# Altium PCB soldeerstation.PcbDoc (part 1 of 2)
Units mm, origin at the board's own origin, x right, y up, seen from the top; angles counter-clockwise.
Board outline 176.66 x 114.17 mm, 2 copper layers (Top Layer, Bottom Layer); 77 components, 72 nets, 293 pads, 46 vias.
Unrouted connection lines stored in the file: 9.
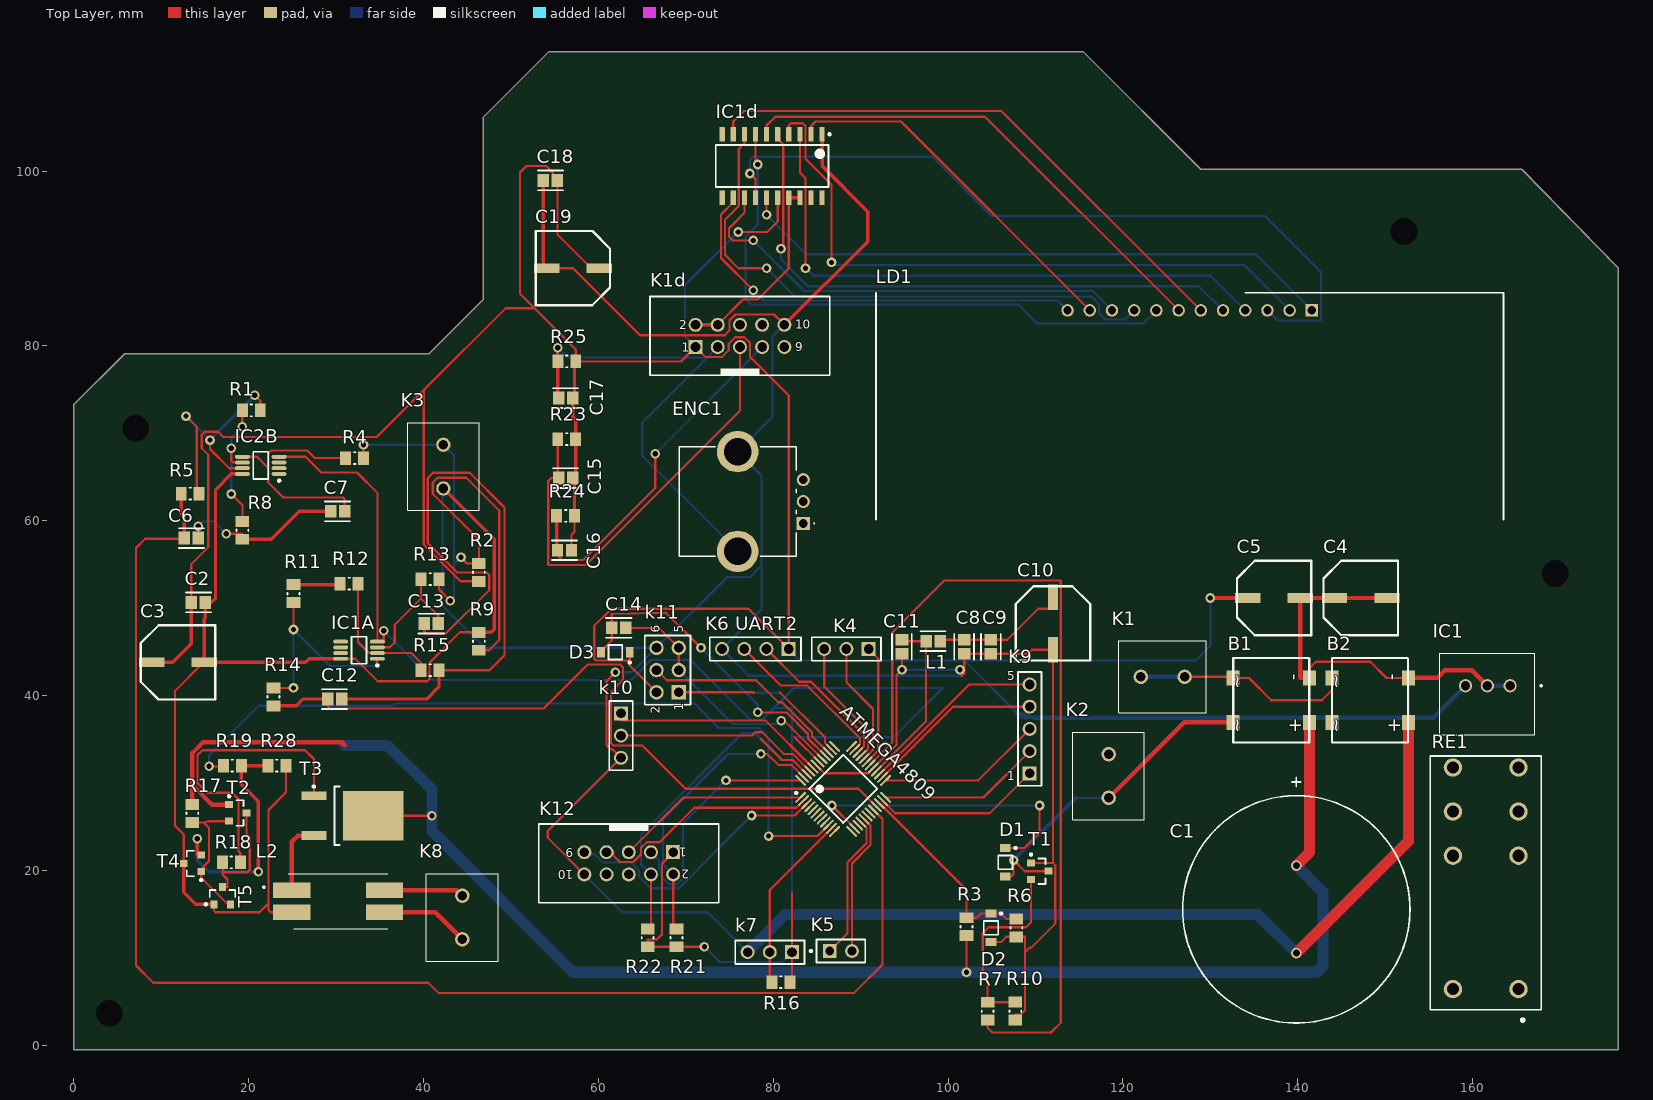
[diagram p0: Top Layer view]
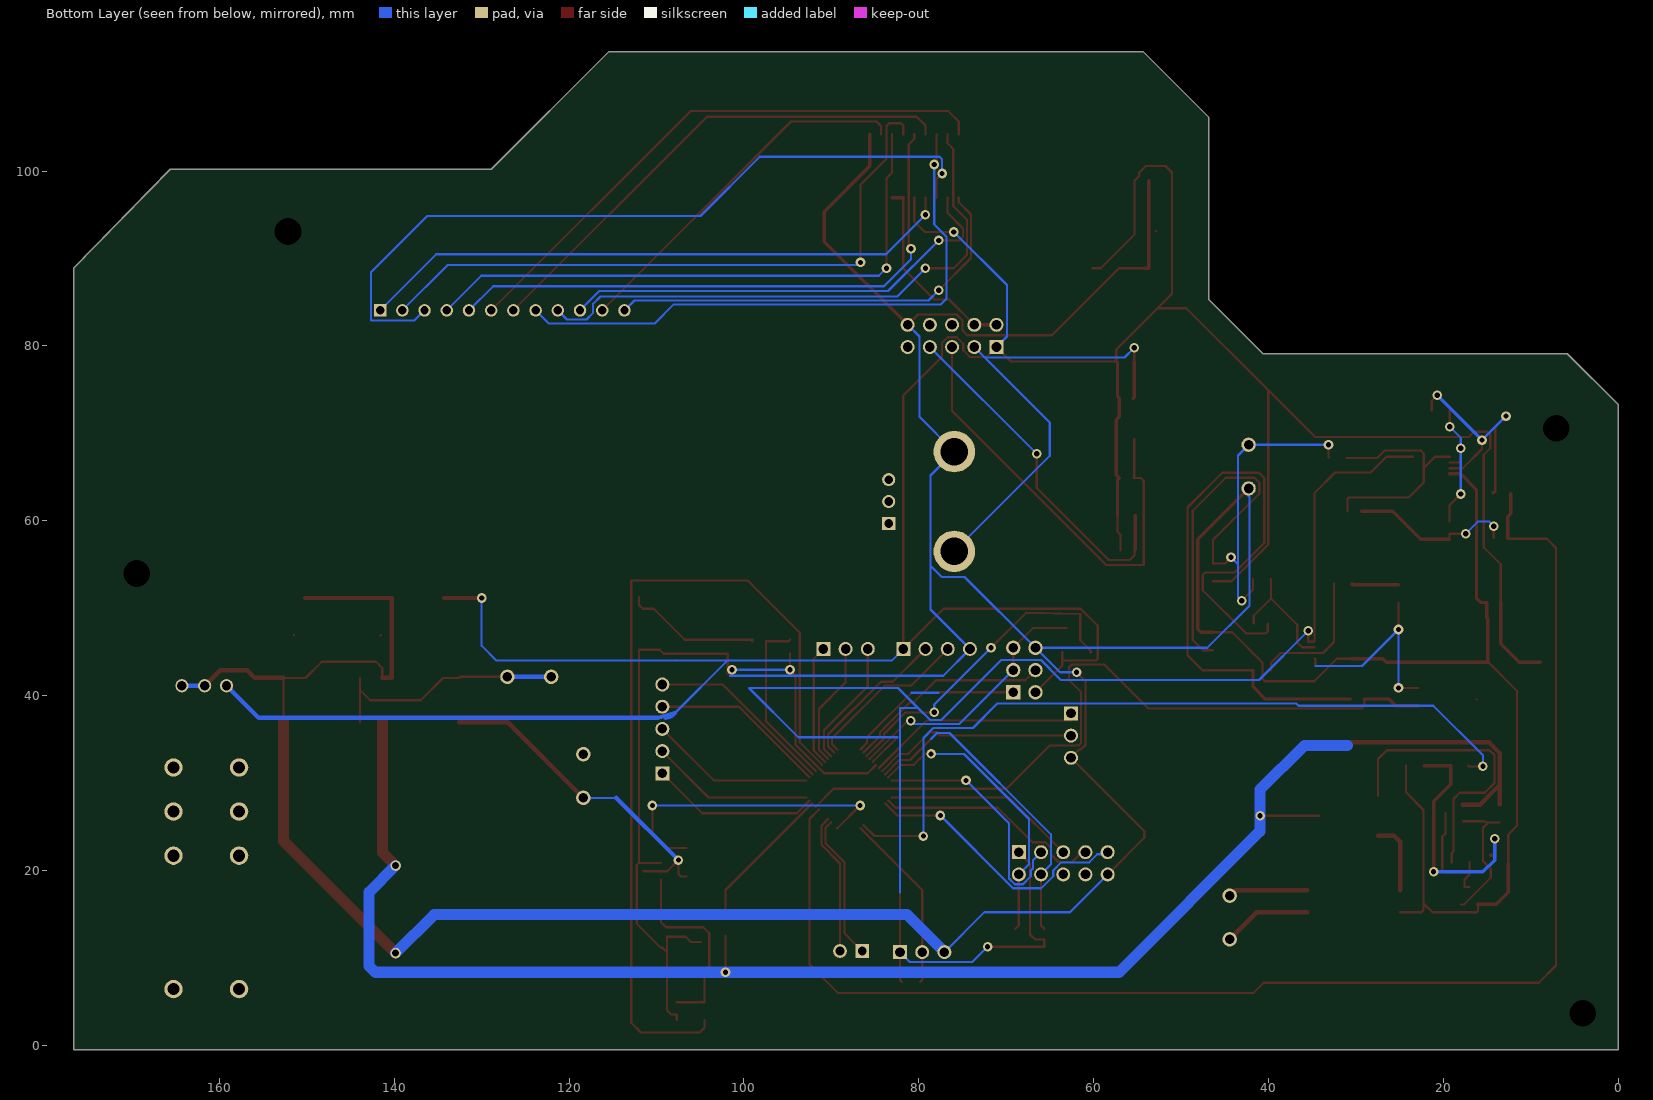
[diagram p1: Bottom Layer view, seen from below]

## Layer stack, top to bottom
Top Solder: solder mask 0.0102, Solder Resist, Dk 3.5
Top Layer: signal copper 0.0356
Dielectric 1: dielectric 0.32, FR-4, Dk 4.8
Bottom Layer: signal copper 0.0356
Bottom Solder: solder mask 0.0102, Solder Resist, Dk 3.5

## Board outline
115.443,113.665 128.905,100.203 165.608,100.203 176.657,88.9 176.657,-0.508 0,-0.508 0,73.279 5.842,79.121 40.64,79.121 46.863,85.344 46.863,106.172 54.356,113.665

## Design rules (kind name [scope] priority, off if disabled: settings)
Clearance [All] p1: gap=0.2 ignorepadtopadclearanceinfootprint=FALSE except(0: Arc-Hole Track-Hole SMDPad-Hole THPad-Hole Via-Hole Fill-Hole Poly-Hole Region-Hole Text-Hole)
Height [All] p1: minheight=0 maxheight=254 prefheight=12.7
PolygonConnect [All] p1: connectstyle=Relief reliefconductorwidth=0.254 reliefentries=4 polygonreliefangle="90 Angle" airgapwidth=0.254
RoomDefinition PWM_soldeerbout [False] p1: confinementstyle=ConfineIn formatcopy=TRUE lockcomponents=FALSE outline 7.239,36.703 50.546,36.703 50.546,5.588 7.239,5.588
RoutingVias [All] p1: holewidth=0.6 width=1.1 viastyle="Through Hole" minholewidth=0.6 minwidth=1.1 maxholewidth=0.6 maxwidth=1.1
SolderMaskExpansion [All] p1: expansion=0.102 istentingtop=FALSE
Width [All] p1: maxlimit=1.27 minlimit=0.248 preferedwidth=0.254 minimp=50.000000 maximp=50.000000 favimp=50.000000
29 further rules are at their usual default settings.

## Classes and differential pairs
component class Voeding: B1 B2 C1 C4 C5 D1 D2 IC1 K1 K2 R3 R6 R7 R10 RE1 T1
component class Thermokoppel: C2 C3 C6 C7 C12 C13 IC1A IC2B K3 R1 R2 R4 R5 R8 R9 R11 R12 R13 R14 R15
component class "PWM Soldeerbout": K8 L2 R17 R18 R19 R28 T2 T3 T4 T5
component class "Microcontroller CPU": C8 C9 C11 C14 D3 K4 K5 "K6 UART2" k7 K9 k10 k11 L1 R16 R21 R22
component class Display: C15 C16 C17 C18 C19 ENC1 IC1d K1d LD1 R23 R24 R25

## Components (designator, comment, footprint, x,y, rotation, side; value= is the part's Value field where it differs from the comment)
ATMEGA4809 "ATMEGA4809" FP-C04-300-PT-IPC_B 87.997,29.351 r45 top
B1 "Bridge_Rectifier" ttf 136.906,39.497 r270 top
B2 "Bridge_Rectifier" ttf 148.209,39.497 r270 top
C1 "4700µ 50v" CE_D25_L25_plugin 139.827,10.574 r90 top
C2 "10µ 50v" CC_0805_L 14.263,50.673 r0 top value="0.22 μF"
C3 "100n" CE_D8_L10 11.938,43.815 r180 top
C4 "100µ 25V" CE_D8_L10 147.193,51.181 r180 top
C5 "10µ 50V" CE_D8_L10 137.287,51.181 r180 top
C6 "10n" CC_0805_L 13.462,58.039 r0 top value="0.22 μF"
C7 "10n" CC_0805_L 30.187,61.087 r180 top value="0.22 μF"
C8 "100nf" CC_0805_L 101.84,45.607 r270 top value="0.22 μF"
C9 "100nf" CC_0805_L 104.888,45.607 r270 top value="0.22 μF"
C10 "10µf" CE_D8_L10 112,48.274 r90 top
C11 "100nf" CC_0805_L 94.728,45.607 r270 top value="0.22 μF"
C12 "10n" CC_0805_L 29.845,39.624 r0 top value="0.22 μF"
C13 "10n" CC_0805_L 40.894,48.26 r180 top value="0.22 μF"
C14 "100n" CC_0805_L 62.343,47.766 r0 top value="0.22 μF"
C15 "10n" CC_0805_L 56.261,64.897 r180 top value="0.22 μF"
C16 "10n" CC_0805_L 56.134,56.642 r180 top value="0.22 μF"
C17 "10n" CC_0805_L 56.261,74.041 r180 top value="0.22 μF"
C18 "100n" CC_0805_L 54.522,98.933 r180 top value="0.22 μF"
C19 "100µ" CE_D8_L10 57.102,88.9 r0 top
D1 "Diode" SOD-123FL 106.553,20.955 r270 top value=15pF
D2 "5v1" SOD-123FL 104.902,13.462 r270 top
D3 "Diode" SOD-123FL 61.962,44.972 r180 top value=15pF
ENC1 "ROTARY_ENCODER" PEC11R4225FN0024 83.446,59.715 r90 top
IC1 "OKI-78SR-5/1.5-W36-C" OKI78SR515W36C 164.271,41.148 r180 top
IC1A "Dual_Opamp" MSOP_8_M 32.639,45.212 r180 top
IC1d "TM1637" SOP_20_M 79.883,100.584 r270 top
IC2B "Dual_Opamp" MSOP_8_M 21.395,66.35 r180 top
K1 "282836-2" "Schroefconnector 2 Pin" 122.047,42.164 r180 top
K1d "61201021621" "box header 10-pin" 76.2,81.153 r0 top
K2 "282836-2" "Schroefconnector 2 Pin" 118.364,33.321 r90 top
K3 "282836-2" "Schroefconnector 2 Pin" 42.291,68.707 r90 top
K4 "61300311121" "pin header 1x3" 88.378,45.353 r180 top
K5 "M20-9990246" "pin header 1x2" 87.743,10.809 r0 top
"K6 UART2" "61300411121" "pin header 1x4" 77.964,45.353 r180 top
k7 "61300311121" "pin header 1x3" 79.615,10.682 r180 top
K8 "282836-2" "Schroefconnector 2 Pin" 44.45,12.145 r270 top
K9 "61300511121" "pin header 1x5" 109.333,36.209 r90 top
k10 "61300311121" "pin header 1x3" 62.597,35.447 r270 top
k11 "61300621121" "pin header 2x6" 67.931,42.94 r90 top
K12 "" "box header 10-pin" 63.486,20.842 r180 top
L1 "Choke" CC_0805_L 98.284,46.242 r0 top
L2 "Common_Mode_Choke" 2545 30.255,16.51 r270 top
LD1 "7 Segment" 7-Sigment 133.985,84.074 r270 top
R1 "18k" RESC2013X50X30ML20T20 20.32,72.644 r180 top
R2 "1M" RESC2013X50X30ML20T20 46.355,54.111 r270 top
R3 "68k" RESC2013X50X30ML20T20 102.108,13.589 r270 top
R4 "5K6" RESC2013X50X30ML20T20 32.131,67.183 r0 top
R5 "5K6" RESC2013X50X30ML20T20 13.335,63.119 r0 top
R6 "10k" RESC2013X50X30ML20T20 107.823,13.462 r90 top
R7 "10k" RESC2013X50X30ML20T20 104.521,3.928 r90 top
R8 "1k" RESC2013X50X30ML20T20 19.304,58.928 r90 top
R9 "10M" RESC2013X50X30ML20T20 46.355,46.228 r270 top
R10 "4k7" RESC2013X50X30ML20T20 107.696,3.937 r90 top
R11 "18k" RESC2013X50X30ML20T20 25.146,51.68 r90 top
R12 "18k" RESC2013X50X30ML20T20 31.496,52.832 r0 top
R13 "5K6" RESC2013X50X30ML20T20 40.767,53.34 r0 top
R14 "5K6" RESC2013X50X30ML20T20 22.86,39.878 r90 top
R15 "100" RESC2013X50X30ML20T20 40.758,42.926 r180 top
R16 "47k" RESC2013X50X30ML20T20 80.894,7.253 r180 top
R17 "4K7" RESC2013X50X30ML20T20 13.589,26.543 r90 top
R18 "100" RESC2013X50X30ML20T20 18.043,20.955 r0 top
R19 "10k" RESC2013X50X30ML20T20 18.161,32.004 r0 top
R21 "47k" RESC2013X50X30ML20T20 68.947,12.324 r270 top
R22 "47k" RESC2013X50X30ML20T20 65.645,12.324 r270 top
R23 "10k" RESC2013X50X30ML20T20 56.388,69.342 r0 top
R24 "10k" RESC2013X50X30ML20T20 56.261,60.579 r0 top
R25 "10k" RESC2013X50X30ML20T20 56.397,78.232 r0 top
R28 "4K7" RESC2013X50X30ML20T20 23.25,32.004 r180 top
RE1 "RELAY_GENERAL_PURPOSE" RT42 161.484,6.457 r90 top
T1 "BC547" SOT_23 110.49,19.939 r0 top
T2 "Transistor_NPN" SOT_23 18.78,26.604 r0 top
T3 "MOSFET_P" TO_252 31.877,26.289 r0 top
T4 "BC547" SOT_23 13.589,20.828 r180 top
T5 "BC557" SOT_23 17.018,17.145 r90 top

## Footprints (in the part's own frame and the unit in brackets; to place one, negate y for a bottom-side part, rotate by r counter-clockwise, add the part's x,y. Pads: shape width x height; smd on the part's side, far side on the other; paste and mask are expansions set on the pad)
7-Sigment [mm]
  rect 1.425x1.425 hole 0.95: 1(0,7.62)
  round 1.425 hole 0.95: 2(0,5.08) 3(0,2.54) 4(0,0) 5(0,-2.54) 6(0,-5.08) 7(0,-7.62) 8(0,-10.16) 9(0,-12.7) 10(0,-15.24) 11(0,-17.78) 12(0,-20.32)
  silkscreen extent -2.02,-42.23 23.93,29.53
2545 [mm]
  rect 1.78x4.27 smd: 1(-1.27,-5.305) 2(1.27,-5.305) 3(1.27,5.305) 4(-1.27,5.305)
  silkscreen extent -3.15,-8.6 3.15,5.69, body extent -3.15,-7.26 3.15,7.26, height 9.6
"box header 10-pin" [mm] "10 pins, straight, gold plating"
  rect 1.6x1.6 hole 1.1: 1(-5.08,-1.27)
  round 1.6 hole 1.1: 2(-5.08,1.27) 3(-2.54,-1.27) 4(-2.54,1.27) 5(0,-1.27) 6(0,1.27) 7(2.54,-1.27) 8(2.54,1.27) 9(5.08,-1.27) 10(5.08,1.27)
  silkscreen extent -10.28,-4.5 10.28,4.5, body extent -10.18,-4.42 10.18,4.75, height 9.13
CC_0805_L [mm]
  rect 1.305x1.456 smd paste+0 mask+0: 1(-0.801,0) 2(0.801,0)
  silkscreen extent -1.45,-1.13 1.45,1.13, body extent -1.7,-0.98 1.7,0.98, height 0.25
CE_D8_L10 [mm]
  rect 2.9x1.1 smd: 1(-3,0) 2(3,0)
  Top Layer lines w0.254: -4.25,4.241 -4.259,4.25
  silkscreen extent -4.26,-4.25 4.25,4.25
CE_D25_L25_plugin [mm]
  round 1.2 hole 0.8: 1(0,0) 2(10,0)
  silkscreen extent -8,-13 20.07,13
FP-C04-300-PT-IPC_B [mm]
  rect 1.655x0.252 smd paste+0 mask+0: 1(-4.126,2.75)
  rrect100% 1.655x0.252 smd paste+0 mask+0: 2(-4.125,2.25) 3(-4.125,1.75) 4(-4.125,1.25) 5(-4.126,0.75) 6(-4.126,0.25) 7(-4.125,-0.25) 8(-4.125,-0.75) 9(-4.126,-1.25) 10(-4.126,-1.75) 11(-4.126,-2.25) 12(-4.126,-2.75) 25(4.125,-2.75) 26(4.125,-2.25) 27(4.125,-1.75) 28(4.125,-1.25) 29(4.126,-0.75) 30(4.126,-0.25) 31(4.125,0.25) 32(4.125,0.75) 33(4.126,1.25) 34(4.126,1.75) 35(4.126,2.25) 36(4.125,2.75)
  rrect100% 0.252x1.655 smd paste+0 mask+0: 13(-2.75,-4.125) 14(-2.25,-4.126) 15(-1.75,-4.126) 16(-1.25,-4.126) 17(-0.75,-4.126) 18(-0.25,-4.125) 19(0.25,-4.126) 20(0.75,-4.126) 21(1.25,-4.126) 22(1.75,-4.126) 23(2.25,-4.125) 24(2.75,-4.125) 37(2.75,4.125) 38(2.25,4.125) 39(1.75,4.125) 40(1.25,4.125) 41(0.75,4.125) 42(0.25,4.125) 43(-0.25,4.125) 44(-0.75,4.125) 45(-1.25,4.125) 46(-1.75,4.125) 47(-2.25,4.125) 48(-2.75,4.125)
  silkscreen extent -4.25,-2.75 2.75,3.58, body extent -5.2,-5.2 5.2,5.2, height 0.25
MSOP_8_M [mm] "TSOP, 8-Leads, Body 3x3mm, Pitch 0.65mm, IPC Medium Density"
  oval 1.7x0.45 smd: 1(-2.1,0.975) 2(-2.1,0.325) 3(-2.1,-0.325) 4(-2.1,-0.975) 5(2.1,-0.975) 6(2.1,-0.325) 7(2.1,0.325) 8(2.1,0.975)
  silkscreen extent -2.22,-1.55 0.85,1.87, body extent -1.55,-1.55 1.55,1.55, height 1.1
OKI78SR515W36C [mm]
  round 1.519 hole 1.08: 1(0,0) 2(2.6,0) 3(5.1,0)
  silkscreen extent -3.6,-3.7 8.05,5.6, body extent -2.85,-3.7 8.05,5.6, height 16.6
PEC11R4225FN0024 [mm]
  round 4.74 hole 3.16: 1(-3.2,7.5) 2(8.2,7.5)
  rect 1.5x1.5 hole 1: A1(0,0)
  round 1.5 hole 1: B1(5,0) C1(2.5,0)
  silkscreen extent -3.75,-1.3 8.75,14.2, body extent -4.67,-0.4 9.68,14.2, height 31.6
"pin header 1x2" [mm]
  rect 1.57x1.57 hole 1.02 paste-1000 mask+0: 1(-1.27,0)
  round 1.57 hole 1.02 paste-1000 mask+0: 2(1.27,0)
  silkscreen extent -3.55,-1.32 2.79,1.32, body extent -2.89,-1.42 2.89,1.42, height 0.25
"pin header 1x3" [mm] "Pin Header, pitch 2.54 mm, THT, Vertical, single row, 3p"
  rect 1.6x1.6 hole 1.1: 1(-2.54,0)
  round 1.6 hole 1.1: 2(0,0) 3(2.54,0)
  silkscreen extent -3.96,-1.34 3.96,1.34, body extent -3.81,-1.27 3.81,1.27, height 8.57
"pin header 1x4" [mm] "Pin Header, pitch 2.54 mm, THT, Vertical, single row, 4p"
  rect 1.6x1.6 hole 1.1: 1(-3.81,0)
  round 1.6 hole 1.1: 2(-1.27,0) 3(1.27,0) 4(3.81,0)
  silkscreen extent -5.23,-1.34 5.23,1.34, body extent -5.08,-1.27 5.08,1.27, height 8.57
"pin header 1x5" [mm] "Pin Header, pitch 2.54 mm, THT, Vertical, single row, 5p"
  rect 1.6x1.6 hole 1.1: 1(-5.08,0)
  round 1.6 hole 1.1: 2(-2.54,0) 3(0,0) 4(2.54,0) 5(5.08,0)
  silkscreen extent -6.5,-1.34 6.5,1.34, body extent -6.35,-1.27 6.35,1.27, height 8.57
"pin header 2x6" [mm] "Pin Header, pitch 2.54 mm, THT, Vertical, dual row, 6p"
  rect 1.65x1.65 hole 1.1: 1(-2.54,-1.27)
  round 1.65 hole 1.1: 2(-2.54,1.27) 3(0,-1.27) 4(0,1.27) 5(2.54,-1.27) 6(2.54,1.27)
  silkscreen extent -3.96,-2.61 3.96,2.61, body extent -3.81,-2.54 3.81,2.54, height 8.59
RESC2013X50X30ML20T20 [mm] "Chip Resistor, 2-Leads, Body 2.00x1.25mm, IPC Low Density"
  rect 1.25x1.55 smd: 1(-1.025,0) 2(1.025,0)
  silkscreen extent -0.1,-0.67 0.1,0.67, body extent -1.1,-0.72 1.1,0.72, height 0.5
RT42 [mm]
  round 2.1 hole 1.4: 1(0,-3.75) 2(15.26,-3.75) 3(20.3,-3.75) 4(25.34,-3.75) 5(25.34,3.75) 6(20.3,3.75) 7(15.26,3.75) 8(0,3.75)
  silkscreen extent -3.67,-6.35 26.65,6.35, body extent -2.21,-6.35 26.79,6.35, height 15.86
"Schroefconnector 2 Pin" [mm]
  round 1.65 hole 1.1: 1(0,0) 2(-5,0)
  silkscreen extent -7.5,-4.1 2.5,4.1, body extent -8.09,-4.1 2.51,4.1, height 10.02
SOD-123FL [mm] "SOD, 2-Leads, Body 2.7x1.65mm"
  rect 0.91x1.22 smd: 1(-1.635,0) 2(1.635,0)
  silkscreen extent -1.76,-0.82 0.78,1.29, body extent -1.35,-0.82 1.35,0.82, height 1
SOP_20_M [mm] "SOIC,20-Leads,Body 12.9x5.6mm,Pitch 1.27mm,IPC Medium Density"
  rrect17% 1.65x0.6 smd: 1(-3.625,5.715) 2(-3.625,4.445) 3(-3.625,3.175) 4(-3.625,1.905) 5(-3.625,0.635) 6(-3.625,-0.635) 7(-3.625,-1.905) 8(-3.625,-3.175) 9(-3.625,-4.445) 10(-3.625,-5.715) 11(3.625,-5.715) 12(3.625,-4.445) 13(3.625,-3.175) 14(3.625,-1.905) 15(3.625,-0.635) 16(3.625,0.635) 17(3.625,1.905) 18(3.625,3.175) 19(3.625,4.445) 20(3.625,5.715)
  silkscreen extent -3.75,-6.45 2.4,6.69, body extent -2.8,-6.45 2.8,6.45, height 2
SOT_23 [mm] "SOT23, 3-Leads, Body 2.92x1.3mm, Pitch 0.95mm"
  rect 0.9x0.8 smd: 1(-1,0.95) 2(-1,-0.95) 3(1,0)
  silkscreen extent -1.12,-1.46 0.65,2.02, body extent -0.65,-1.46 0.65,1.46, height 1.11
TO_252 [mm] "DPAK, 3-Leads, Body 6.5x6.12mm, Pitch 2.28mm, IPC Low Density"
  rect 2.85x1 smd: 1(-4.4,2.28) 3(-4.4,-2.28)
  rect 6.9x5.65 smd: 2(2.4,0)
  silkscreen extent -4.52,-3.35 -1.45,3.45, body extent -2.05,-3.32 4.17,3.32, height 2.35
ttf [mm]
  rect 1.7x1.5 smd: 1(2.54,4.445) 2(-2.54,4.445) 3(-2.54,-4.318) 4(2.54,-4.318)
  silkscreen extent -4.83,-4.3 4.83,4.4

## Part data
ATMEGA4809: Case/Package=TQFP, Max Operating Temperature=85°C, Min Operating Temperature=-40°C, Core Architecture=AVR, Interface=I2C, Memory Size=48KB, Memory Type=FLASH, Mount="Surface Mount", Number of I/Os=41, Oscillator Type=Internal, Peripherals="Brown-out Detect/Reset", RoHS Compliant=Yes, Series="megaAVR® 0, Functional Safety (FuSa)"
B1 B2: Average Rectified Current-Max=0.8A, Forward Voltage=1V, Manufacturer="Diodes Inc", Package Description="4-Pin Small Outline Integrated Circuit, Body 4.7 x 3.8 mm, Pitch 2.5 mm", Package Reference=MiniDIP-4, Package Version=05/2016, Peak Current-Max=30A, Reverse Current-Max=5µA, Reverse Voltage-Max [Vrrm]=600V, Datasheet URL=http://www.diodes.com/_files/datasheets/ds17003.pdf, Datasheet Version="Rev. 13-2, 12/2010", Manufacturer URL=http://www.diodes.com/, Mounting Technology=SurfaceMount, Package URL=http://www.diodes.com/_files/packages/MiniDIP.pdf
C1 C3 C4 C5 C10 C19: library part Capacitor_Electrolytic, Manufacturer=Panasonic, Max Operating Temperature="105 degC", Min Operating Temperature="-55 degC", Package Quantity=500, Voltage Rating="25 V", ComponentLink1Description="Manufacturer URL", ComponentLink1URL=http://www.panasonic.com/, ComponentLink2Description=Datasheet, ComponentLink2URL=http://industrial.panasonic.com/cdbs/www-data/pdf/RDE0000/ABA0000C1181.pdf, DatasheetVersion=03/2016, Height="10.2 mm", Lead Pitch="3.1 mm", Length="10.2 mm", Mount="Surface Mount", Mounting Technology="Surface Mount", PackageDescription="2-Pin Electrolytic Aluminum Capacitor, Body 8.3 x 8.3 mm", PackageReference=EEE-FK1E221P, Packaging="Tape and Reel", Pins=2, REACH SVHC="No SVHC", RoHSCompliant=true
C2 C6 C7 C8 C9 C11 C12 C13 C14 C15 C16 C17 C18: library part Capacitor_Ceramic, Capacitance="0.22 μF", Manufacturer=KEMET, Manufacturer Part Number=C0805C224K5RACTU, Package=C0805C-DN, Temperature="-55°C to +125°C", Temperature Characteristic=X7R, Temperature Coefficient=30ppm/°C, Temperature Range High=+125°C, Temperature Range Low=-55°C, Tolerance=0.1, Voltage Rating="50 V", Automotive=No, Category=Cap, ComponentLink2Description=Datasheet, ComponentLink2URL=https://content.kemet.com/datasheets/KEM_C1003_C0G_SMD.pdf, Device Class L1="Passive Components", Device Class L2=Capacitors, Device Class L3="Ceramic Capacitors", Digikey Description="CAP CER 0.22UF 50V X7R 0805", Height=0.88mm, Ipc Land Pattern Name=CAPC200125X78, Lead Free=Yes, Material=Ceramic, Mouser Description="CAP CER 0.22UF 50V X7R 0805", Octopart=https://octopart.com/c0805c224k5ractu-kemet-144670, RoHS=TRUE
D1 D3: Capacitance=15pF, Forward Current=1A, Manufacturer=Diotec, Manufacturer Part Number=1N4007, Max Junction Temp=+175°C, Max Repetitive Reverse Voltage=1000V, Max Surge Forward Current=27A, Peak Reverse Current=5uA, Temperature="-50°C to +175°C", Temperature Range Low=-50°C, Automotive=No, Category=Diode, ComponentLink2Description=Datasheet, ComponentLink2URL=https://datasheet.octopart.com/1N4007-Diotec-datasheet-62346875.pdf, Device Class L1="Discrete Semiconductors", Device Class L2=Diodes, Device Class L3="Rectifier Diodes", Height=2.8mm, Ipc Land Pattern Name=DIOAD888W100L520D280, Lead Free=Yes, Octopart=https://octopart.com/1n4007-diotec-4040411, Package=1N4007, Reverse Voltage=1000V, RoHS=TRUE, Temperature Range High=+175°C
D2: library part Zener_Diode, Manufacturer="On Semiconductor", PartNumber=1SMB5920BT3G, ComponentLink1Description="Manufacturer URL", ComponentLink1URL=http://www.onsemi.com/, ComponentLink2Description=Datasheet, ComponentLink2URL=http://www.onsemi.com/pub_link/Collateral/1SMB5913BT3-D.PDF, ComponentLink3Description="Package Specification", ComponentLink3URL=http://www.onsemi.com/pub_link/Collateral/1SMB5913BT3-D.PDF, DatasheetVersion="Rev. 8", Mounting Technology="Surface Mount", PackageDescription="2-Pin Small Molded Package, J-Bend Lead, Body 4.33 x 3.625 mm", PackageReference=SMB-2-403A-03_H, PackageVersion="Rev. H, 05/2011", Packing="Tape and Reel", RoHS=Pb-Free, VZ Typ (V)=6.2
ENC1: Current Rating=10mA, Manufacturer=Bourns, Manufacturer Part Number=PEC11R-4015F-N0024, Package=0, Temperature="-30°C to +70°C", Temperature Range High=+70°C, Temperature Range Low=-30°C, Voltage Rating Dc=5V, Automotive=No, Category=Enc, ComponentLink2Description=Datasheet, ComponentLink2URL=https://www.bourns.com/docs/product-datasheets/pec11r.pdf?sfvrsn=bb617cbf_7, Conn Orientation=Vertical, Detent=No, Device Class L1=Electromechanical, Device Class L2=Switches, Device Class L3=Encoders, Digikey Description="ROTARY ENCODER MECHANICAL 24PPR", Encoder Type=Incremental, Height=22.3mm, Lead Free=Yes, Mouser Description="Encoders 15mm SHAFT NO SWITCH", Number Of Circuits=1, Octopart=https://octopart.com/pec11r-4015f-n0024-bourns-26648251, Pulses Per Rev=24, RoHS=TRUE
IC1: library part "DC/DC Converter", Current - Output (Max)=1.5A, Manufacturer=Murata, Operating Temperature=-40degC~85degC, Package / Case=3-SIPModule, Power (Watts) - Manufacture Series=8W, Voltage - Input (Max)=36V, Voltage - Input (Min)=7V, Voltage - Isolation=-, Voltage - Output 1=5V, Applications=ITE(Commercial), Category=PowerSupplies-BoardMount, Datasheet URL=https://datasheet.ciiva.com/8006/1790439-8006672.pdf, Datasheet Version=Oct-13, Efficiency=90.5%, Family=DCDCConverters, Features=SCP, Manufacturer URL=http://www.murata.com/, Mounting Type=ThroughHole, Number of Outputs=1, Packaging=Tube, Power (Watts) - Max=8W, Series=Okami™OKI-78SR, Size / Dimension="0.41\"Lx0.30\"Wx0.65\"H(10.4mmx7.6mmx16.5mm)", Type=LinearRegulatorReplacement, Voltage - Output 2=-, Voltage - Output 3=-
IC1A IC2B: Case/Package=PDIP, Input Bias Current=1pA, Input Offset Voltage (Vos)=4.5mV, Max Operating Temperature=125°C, Max Supply Voltage=6V, Min Operating Temperature=-40°C, Min Supply Voltage=1.8V, Nominal Supply Current=100uA, Operating Supply Voltage=5.5V, Output Current=23mA, Package Quantity=60, Power Supply Rejection Ratio (PSRR)=86dB, Voltage Gain=112dB, Amplifier Type="GENERAL PURPOSE", Bandwidth=1MHz, Common Mode Rejection Ratio=60dB, Gain Bandwidth Product=1MHz, Height=3.3mm, Input Offset Voltage-Max=4.5mV, Lead Free="Lead Free", Length=9.27mm, Mount="Through Hole", Number of Amplifiers=2, Number of Channels=2, Number Of Circuits=2, Number of Elements=2, Number of Pins=8, Operating Supply Current=100uA, Output Current per Channel=23mA, Packaging=Rail/Tube, Radiation Hardening=No, REACH SVHC="No SVHC", RoHS Compliant=Yes, Slew Rate=0.6V/µs, Slew Rate-Nom=0.6V/µs, Supply Current=100uA, Technology=CMOS, Unity Gain Bandwidth Product=1MHz, Width=6.35mm
IC1d: "LED Drive Control Special Circuit", Package=Package, Availability="Not in stock", Check_prices=https://www.snapeda.com/parts/TM1637/Titan+Micro+Electronics/view-part/?ref=eda, MF="Titan Micro Electronics", MP=TM1637, Price=None, SnapEDA_Link=https://www.snapeda.com/parts/TM1637/Titan+Micro+Electronics/view-part/?ref=snap
K1 K2 K3 K8: library part "Schroefconnector 2 Pin L", "Connector", Manufacturer_Name="TE Connectivity", Datasheet Link=https://www.te.com/commerce/DocumentDelivery/DDEController?Action=showdoc&DocId=Customer+Drawing%7F282836%7FJ%7Fpdf%7FEnglish%7FENG_CD_282836_J.pdf%7F282836-2, Height=10mm, Manufacturer_Part_Number=282836-2
K1d: library part "Box Header", "Male Box Header WR-BHD, THT, Vertical, pitch 2.54 mm, 10 pins", Contact Resistance=20mOhm, Manufacturer="Wurth Elektronik", Operating Temperature=-40to125degC, Withstanding Voltage=500VAC, Working Voltage=250VAC, Datasheet URL=https://katalog.we-online.de/em/datasheet/6120xx21621.pdf, Gender=Male, Manufacturer URL=http://www.we-online.de, Mounting Technology=THT, Orientation=Vertical, Package Reference=61201021621, Packaging=Tray, Part Number=61201021621, Pin Number=10, Pitch=2.54mm, Published Date=August2018, Publisher=WurthElektronik
K4 k7 k10: library part "pin header 1x3pin", "THT Vertical Pin Header WR-PHD, Pitch 2.54 mm, Single Row, 3 pins", Contact Resistance=20mOhm, Manufacturer="Wurth Elektronik", Operating Temperature=-40to105degC, Rated Current=3A, Withstanding Voltage=500VAC, Working Voltage=250VAC, Datasheet URL=https://katalog.we-online.de/em/datasheet/6130xx11121.pdf, Gender=Male, Manufacturer URL=http://www.we-online.de, Mounting Technology=THT, Orientation=Vertical, Package Reference=61300311121, Packaging=Bag, Part Number=61300311121, Pin Number=3, Pitch=2.54mm, Publisher=WurthElektronik, Row Number=Single
K5: library part "pin header 1x2", "CONN HEADER VERT 2POS 2.54MM", Current Rating=3A, Manufacturer=Harwin, Temperature="-40°C to +105°C", Temperature Range High=+105°C, Temperature Range Low=-40°C, Automotive=No, Category=Conn, ComponentLink2Description=Datasheet, ComponentLink2URL=https://cdn.harwin.com/pdfs/M20-999.pdf, Conn Gender=Male, Conn Orientation=Vertical, Contact Material=Tin,Nickel, Device Class L1=Connectors, Device Class L2="Headers and Wire Housings", Device Class L3=unset, Digikey Description="CONN HEADER VERT 2POS 2.54MM", Height=8.99mm, Lead Free=Yes, Manufacturer Part Number=M20-9990246, Mouser Description="2.54mm (0.1\") Pitch SIL Vertical PC Tail Pin Header, 6.1mm mating pin height, tin, 2 contacts", Number Of Contacts=2, Number Of Rows=1, Octopart=https://octopart.com/m20-9990246-harwin-2590635, Package=M20-9990246, Pitch=2.54mm, RoHS=TRUE
"K6 UART2": library part "pin header 1x4", "THT Vertical Pin Header WR-PHD, Pitch 2.54 mm, Single Row, 4 pins", Contact Resistance=20mOhm, Manufacturer="Wurth Elektronik", Operating Temperature=-40to105degC, Rated Current=3A, Withstanding Voltage=500VAC, Working Voltage=250VAC, Datasheet URL=https://katalog.we-online.de/em/datasheet/6130xx11121.pdf, Gender=Male, Manufacturer URL=http://www.we-online.de, Mounting Technology=THT, Orientation=Vertical, Package Reference=61300411121, Packaging=Bag, Part Number=61300411121, Pin Number=4, Pitch=2.54mm, Publisher=WurthElektronik, Row Number=Single
K9: library part "pin header 1x5", "THT Vertical Pin Header WR-PHD, Pitch 2.54 mm, Single Row, 5 pins", Contact Resistance=20mOhm, Manufacturer="Wurth Elektronik", Operating Temperature=-40to105degC, Rated Current=3A, Withstanding Voltage=500VAC, Working Voltage=250VAC, Datasheet URL=https://katalog.we-online.de/em/datasheet/6130xx11121.pdf, Gender=Male, Manufacturer URL=http://www.we-online.de, Mounting Technology=THT, Orientation=Vertical, Package Reference=61300511121, Packaging=Bag, Part Number=61300511121, Pin Number=5, Pitch=2.54mm, Publisher=WurthElektronik, Row Number=Single
k11: library part "pin header 2x6", "THT Vertical Pin Header WR-PHD, Pitch 2.54 mm, Dual Row, 6 pins", Contact Resistance=20mOhm, Manufacturer="Wurth Elektronik", Operating Temperature=-40to105degC, Rated Current=3A, Withstanding Voltage=500VAC, Working Voltage=250VAC, Datasheet URL=https://katalog.we-online.de/em/datasheet/6130xx21121.pdf, Gender=Male, Manufacturer URL=http://www.we-online.de, Mounting Technology=THT, Orientation=Vertical, Package Reference=61300621121, Packaging=Bag, Part Number=61300621121, Pin Number=6, Pitch=2.54mm, Publisher=WurthElektronik, Row Number=Dual
K12: library part "Box Header", "Male Box Header WR-BHD, THT, Vertical, pitch 2.54 mm, 10 pins", Contact Resistance=20mOhm, Manufacturer="Wurth Elektronik", Operating Temperature=-40to125degC, Package Reference=61201021621, Withstanding Voltage=500VAC, Working Voltage=250VAC, Datasheet URL=https://katalog.we-online.de/em/datasheet/6120xx21621.pdf, Gender=Male, Manufacturer URL=http://www.we-online.de, Mounting Technology=THT, Orientation=Vertical, Packaging=Tray, Part Number=61201021621, Pin Number=10, Pitch=2.54mm, Published Date=August2018, Publisher=WurthElektronik
L1: Case/Package=1350, Current Rating=8.5A, DC Resistance (DCR)=14.1mR, Inductance=10uH, Inductance Tolerance=20%, Max Operating Temperature=155°C, Min Operating Temperature=-40°C, Package Quantity=1, Ratings=AEC-Q200, Resistor Type=Wirewound, Saturation Current=10A, Self Resonant Frequency=18MHz, Series Resistance=14.1R, Test Frequency=100kHz, Height=4.7mm, Height - Seated (Max)=0.197inch, Length=0.512inch, Max DC Current=8.5A, Mount="Surface Mount", Packaging="Tape and Reel", RMS Current (Irms)=8.5A, RoHS Compliant=Yes, Series=WE-HCI, Shielding=Shielded, Termination=SMD/SMT, Tolerance=20%, Width=12.8mm
L2: Case/Package=1808, Current=2A, Current Rating=2.3A, DC Resistance (DCR)=60mR, Insulation Resistance=10MR, Max Operating Temperature=85°C, Max Voltage Rating (DC)=50V, Min Operating Temperature=-40°C, Package Quantity=1, Test Frequency=100MHz, DC Current=2A, DC Resistance-Max=60mR, Depth=4.7mm, Element Configuration=Dual, Height=2mm, Impedance=900R, Lead Free="Lead Free", Length=0.185inch, Max Current Rating=2A, Max DC Current=2A, Mount="Surface Mount", Number of Lines=2, Number of Pins=4, Packaging="Tape and Reel", Radiation Hardening=No, REACH SVHC="No SVHC", RoHS Compliant=Yes, Series=ACM, Termination=Flat, Voltage Rating=50V, Voltage Rating (DC)=50V, Width=4.5mm
LD1: library part "7 Sigment"
R1 R2 R3 R4 R5 R6 R7 R8 R9 R10 R11 R12 R13 R14 R15 R16 R17 R18 R19 R21 R22 R23 R24 R25 R28: library part Weerstand, Manufacturer="Vishay Dale", Part Number=CRCW08050000Z0EA
RE1: Ambient Temperature Range High=+85°C, Ambient Temperature Range Low=-40°C, Coil Power=403mW, Coil Resistance=62Ω, Coil Voltage=5V, Current Rating=8A, Manufacturer="TE Connectivity", Manufacturer Part Number=RT424005, Automotive=No, Category=Relay, Coil Type=Non-Latching, ComponentLink2Description=Datasheet, ComponentLink2URL=https://www.te.com/commerce/DocumentDelivery/DDEController?Action=showdoc&DocId=Data+Sheet%7FRT2%7F1014%7Fpdf%7FEnglish%7FENG_DS_RT2_1014.pdf%7F5-1393243-9, Device Class L1=Electromechanical, Device Class L2=Relays, Device Class L3="Power Relays", Digikey Description="RELAY GENERAL PURPOSE DPDT 8A 5V", Height=15.7mm, Lead Free=Yes, Mouser Description="General Purpose Relay, Rt2 Series, Power, Non Latching, Dpdt, 5 Vdc, 8 A Rohs Compliant: Yes", Number Of Contacts=2, Octopart=https://octopart.com/5-1393243-9-te+connectivity-41835766, Package=RT424005, RoHS=TRUE, Throw Configuration=DPDT
T1 T4: library part Transistor_NPN, Manufacturer="On Semiconductor", PartNumber=BC547C, ComponentLink1Description="Manufacturer URL", ComponentLink1URL=http://www.onsemi.com/, ComponentLink2Description=Datasheet, ComponentLink2URL=http://www.onsemi.com/pub_link/Collateral/BC546-D.PDF, ComponentLink3Description="Package Specification", ComponentLink3URL=http://www.onsemi.cn/pub_link/Collateral/2N6426-D.PDF, DatasheetVersion="Rev. 7", fT Min (MHz)=150, IC Continuous (A)=0.1, Mounting Technology="Through Hole", PackageDescription="3-Pin Transistor Outline, Body 4.825 x 3.685 mm, Pitch 1.27 mm", PackageReference=TO-92-3-29-11_AM_SL, PackageVersion="Rev. AM", Packing="Bulk Box", Polarity=NPN, RoHS=FALSE
T2: Manufacturer="On Semiconductor", PartNumber=BC547C, ComponentLink1Description="Manufacturer URL", ComponentLink1URL=http://www.onsemi.com/, ComponentLink2Description=Datasheet, ComponentLink2URL=http://www.onsemi.com/pub_link/Collateral/BC546-D.PDF, ComponentLink3Description="Package Specification", ComponentLink3URL=http://www.onsemi.cn/pub_link/Collateral/2N6426-D.PDF, DatasheetVersion="Rev. 7", fT Min (MHz)=150, IC Continuous (A)=0.1, Mounting Technology="Through Hole", PackageDescription="3-Pin Transistor Outline, Body 4.825 x 3.685 mm, Pitch 1.27 mm", PackageReference=TO-92-3-29-11_AM_SL, PackageVersion="Rev. AM", Packing="Bulk Box", Polarity=NPN, RoHS=FALSE
T3: Continuous Drain Current Id=2.4A, Current Temperature=25°C, Drain Source Voltage Vds=20V, Manufacturer="Fairchild Semiconductor", On Resistance Rds(on)=52mohm, Operating Temperature Max=150°C, Operating Temperature Min=-55°C, Operating Temperature Range=-55°Cto+150°C, Package / Case=SOT-23, Package Description="3-Pin Small Outline Transistor, Body 2.92 x 1.4 mm, Pitch 0.95 mm", Package Reference=SSOT3L, Package Version="Rev. 3, 05/2015", Power Dissipation Pd=500mW, Pulse Current Idm=10A, Rds(on) Test Voltage Vgs=-4.5V, Threshold Voltage Vgs Typ=-800mV, Voltage Vds Typ=-20V, Voltage Vgs th Max=-1.5V, Current Id Max=2.4A, Datasheet URL=https://www.fairchildsemi.com/datasheets/FD/FDN304P.pdf, Datasheet Version="Rev. C, 01/2001", External Depth=2.5mm, External Length / Height=1.12mm, External Width=3.05mm, Full Power Rating Temperature=25°C, Manufacturer URL=https://www.fairchildsemi.com/, Mounting Technology=SurfaceMount, No. of Pins=3, Package URL=https://www.fairchildsemi.com/package-drawings/MA/MA03B.pdf, Reel Quantity=3000, SMD Marking=304P, SVHC=NoSVHC(19-Dec-2012), Tape Width=8mm, Termination Type=SMD, Transistor Case Style=SOT-23, Transistor Polarity=PChannel, Voltage Vds=20V, Voltage Vgs Max=-800mV, Voltage Vgs Rds on Measurement=-4.5V
T5: library part Transistor_PNP, Manufacturer="On Semiconductor", PartNumber=BC557C, ComponentLink1Description="Manufacturer URL", ComponentLink1URL=http://www.onsemi.com/, ComponentLink2Description=Datasheet, ComponentLink2URL=http://www.onsemi.com/pub_link/Collateral/BC556B-D.PDF, ComponentLink3Description="Package Specification", ComponentLink3URL=http://www.onsemi.cn/pub_link/Collateral/2N6426-D.PDF, DatasheetVersion="Rev. 3", IC Continuous (A)=-0.1, Mounting Technology="Through Hole", PackageDescription="3-Pin Transistor Outline, Body 4.825 x 3.685 mm, Pitch 1.27 mm", PackageReference=TO-92-3-29-11_AM_SL, PackageVersion="Rev. AM", Packing="Bulk Box", Polarity=PNP, RoHS=FALSE

## Free pads (board coordinates)
  round 1.524 hole 3.048: 1(152.146,93.091) 2(169.418,53.975) 3(7.112,70.612) 4(4.064,3.683)

## Via types
v1: diameter 1.1, hole 0.6, Top Layer to Bottom Layer, 46 vias

## Nets (pads, with @x,y where several pads share a name; then routed paths per layer and width w, separated by ;. In a path a pad name is that pad's centre, name@x,y a point inside that pad or via, vN(x,y) a via of type N, cw(c..) or ccw(c..) an arc to the next point about the centre after c; other vN are vias at no path point)
4: "K6 UART2.4" ATMEGA4809.29 ATMEGA4809.43 B1.2 B2.1 B2.2 C1.1 C2.2 C3.1 C4.1 C4.2 C5.1 C8.2 C9.2 C10.1 C11.2 C18.2 C19.1 D2.2 ENC1.2 IC1.1 IC1.2 IC1A.8 IC1d.1 IC2B.8 K1d.10 K3.2 k7.3 k10.3 k11.6 K12.10 L2.2 R6.1 R9.1 R10.1 R28.1 T1.1 T4.3 T5.1 | length 640.7
  Top Layer w0.254: T4.3 12.589,24.13 11.608,25.111 11.608,40.589 14.834,43.815 C3.1 ; T5.1 16.068,15.377 16.205,15.24 21.26,15.24 22.276,16.256 ; R28.1 24.275,28.949 22.276,26.949 22.276,16.256 ; L2.2 22.53,15.24 22.276,15.494 22.276,16.256 ; IC1A.8 32.192,44.237 34.773,41.656 40.437,41.656 40.691,41.91 40.691,43.773 44.171,47.253 R9.1 ; C19.1 57.099,88.9 64.77,81.229 74.451,81.229 75.01,81.788 75.01,82.931 75.692,83.613 80.09,83.613 K1d.10 ; K12.10 54.215,23.763 54.215,24.525 k10.3 61.643,33.861 61.468,33.861 60.949,34.381 60.949,41.673 v1(61.962,42.686) ; ATMEGA4809.43@84.904,32.092 85.853,31.142 90.848,31.142 91.443,31.738 94.093,34.387 94.093,42.332 v1(94.728,42.967) C11.2 ; v1(101.359,42.967) 101.84,43.448 ; 101.566,42.298 101.797,42.529 101.84,42.572 101.84,42.967 101.84,43.448 ; D2.2 106.045,11.827 106.655,12.437 R6.1 108.814,12.437 108.814,10.668 ; R10.1 107.696,3.556 108.306,3.556 108.814,4.064 108.814,10.668 ; T1.1 112,20.889 ; B1.2 141.351,43.18 142.062,43.891 148.285,43.891 150.139,42.037 B2.2 B2.1 ; 101.84,43.448 C8.2 C9.2 109.167,44.807 109.635,45.274 C10.1 112,20.889 ; 108.814,10.668 109.322,11.176 109.499,11.176 112.268,13.945 112.268,20.635 112.014,20.889 112,20.889
  Top Layer w0.381: T4.3 12.589,17.526 13.97,16.145 T5.1 ; IC2B.8 18.034,65.375 16.231,63.572 16.231,51.181 15.723,50.673 C2.2 15.064,48.92 14.938,48.795 C3.1 26.527,43.815 26.949,44.237 IC1A.8 ; K3.2 48.102,57.896 48.102,47.594 47.761,47.253 R9.1 ; C18.2 53.721,88.9 C19.1 ; K1d.10 90.805,91.948 90.805,95.377 85.598,100.584 IC1d.1
  Top Layer w0.508: B1.2 140.287,42.037 C5.1 C4.2 C4.1 ; B2.2 155.931,42.037 156.82,42.926 159.893,42.926 IC1.2
  Top Layer w1.27: C1.1 152.654,23.401 B2.1
  Bottom Layer w0.254: K3.2 42.291,62.84 42.189,62.738 42.189,50.292 47.001,45.48 k11.6 ; K12.10 62.724,15.254 72.503,15.254 k7.3 ; v1(61.962,42.686) 63.867,42.686 k11.6 ; K1d.10 79.934,81.077 79.934,71.903 ENC1.2 78.664,65.197 78.664,54.864 ; v1(94.728,42.967) v1(101.359,42.967) ; 101.566,42.298 101.359,42.298 94.728,42.298 77.209,42.298 74.154,45.353 78.664,49.863 78.664,54.864 ; k11.6 74.774,53.594 77.394,53.594 78.664,54.864
  Bottom Layer w0.508: IC1.2 IC1.1
  Bottom Layer w1.27: k7.3 81.378,14.986 135.415,14.986 C1.1
8: "K6 UART2.1" C2.1 C3.2 C5.2 C15.1 C16.1 C17.1 C18.1 C19.2 D3.1 IC1.3 IC1d.16 K1d.1 k11.2 R2.2 R23.2 R24.2 R25.2 | length 421
  Top Layer w0.254: C2.1 13.462,55.042 15.392,56.972 15.392,67.563 14.654,68.301 14.654,69.85 14.986,70.182 16.535,70.182 17.121,69.596 34.671,69.596 40.04,74.965 ; R2.2 44.249,53.086 40.04,57.294 40.04,74.965 ; C16.1 56.935,58.408 57.286,58.759 R24.2 ; C19.2 59.207,88.9 55.323,92.785 C18.1 54.807,99.449 54.807,99.828 54.051,100.584 51.787,100.584 51.054,99.851 51.054,85.979 52.705,84.328 ; D3.1 63.597,44.035 ; k11.2 63.597,43.464 63.597,44.035 ; v1(75.997,93.04) 79.324,93.04 80.518,94.234 IC1d.16 ; 40.04,74.965 49.403,84.328 52.705,84.328 ; 52.705,84.328 57.422,79.611 R25.2 69.469,78.232 K1d.1 72.247,78.756 74.168,78.756 74.93,79.518 74.93,80.264 75.676,81.01 76.708,81.01 77.343,80.375 77.343,78.765 81.774,74.335 81.774,45.353 77.168,49.96 61.503,49.96 59.545,48.002 59.545,44.227 59.736,44.035 63.597,44.035
  Top Layer w0.381: C3.2 11.354,43.815 13.462,45.923 C2.1 ; R24.2 57.286,64.673 C15.1 57.413,65.248 R23.2 57.413,71.543 57.062,71.894 C17.1 57.277,74.256 57.277,78.087 R25.2
  Top Layer w0.508: v1(129.997,51.181) C5.2
  Bottom Layer w0.254: K1d.1 69.926,81.077 69.926,86.97 v1(75.997,93.04) ; 81.774,45.353 83.109,44.018 101.905,44.018 ; v1(129.997,51.181) 129.997,45.72 128.295,44.018 101.905,44.018 ; 101.905,44.018 107.89,38.033 101.905,44.018
  Bottom Layer w0.508: IC1.3 155.488,37.465 109.888,37.465 ; 107.89,38.033 ccw(c109.4,39.573) 108.952,37.463 cw(c109.4,39.573) 107.89,38.033 ; 107.89,38.033 109.888,37.465 ; 107.89,38.033 109.847,37.463 ; 109.847,37.463 cw(c109.888,36.957) 109.888,37.465 ; 109.847,37.463 cw(c109.888,36.957) 109.888,37.465 ; 109.847,37.463 109.888,37.465
+5: ATMEGA4809.14 ATMEGA4809.42 C8.1 C9.1 C10.2 D1.1 IC1A.4 IC2B.4 k7.1 K12.1 L1.2 R16.1 R21.2 R22.2 | length 241.5
  Top Layer w0.254: IC2B.4 26.528,67.325 28.321,65.532 32.41,65.532 34.739,63.203 IC1A.4 35.458,46.187 v1(35.458,47.447) ; K12.1 67.285,20.831 67.285,12.7 66.7,12.116 65.645,12.116 R22.2 R21.2 v1(72.14,11.299) ; R16.1 82.155,7.489 k7.1 82.155,17.516 ; 82.446,35.255 ATMEGA4809.42 ; v1(86.716,27.45) ATMEGA4809.14 ; L1.2 99.06,46.242 99.06,46.408 C8.1 C9.1 106.761,46.408 110.304,49.951 111.577,49.951 112,50.374 C10.2 ; D1.1 108.712,22.59 110.465,24.343 v1(110.465,27.45)
  Bottom Layer w0.254: v1(35.458,47.447) 41.096,41.809 63.755,41.809 66.04,44.094 70.561,44.094 77.43,37.225 78.704,37.225 80.086,38.608 ; v1(72.14,11.299) 73.884,9.555 81.028,9.555 k7.1 ; 82.155,17.516 82.149,17.522 82.149,38.577 80.086,38.608 ; 82.446,35.255 93.774,35.255 99.412,40.894 82.372,40.894 80.086,38.608 ; v1(86.716,27.45) v1(110.465,27.45)
NetATMEGA4809_1: ATMEGA4809.1 K12.5 | length 22.2
  Top Layer w0.254: K12.5 69.752,28.379 ATMEGA4809.1
NetATMEGA4809_2: ATMEGA4809.2 K12.7 | length 26.6
  Top Layer w0.254: K12.7 61.747,22.112 61.747,21.717 62.484,20.98 64.033,20.98 64.897,21.844 64.897,22.606 65.532,23.241 67.005,23.241 70.968,27.203 82.666,27.203 ATMEGA4809.2@83.488,28.025
NetATMEGA4809_3: ATMEGA4809.3 K12.9 | length 31.5
  Top Layer w0.254: v1(77.533,26.303) 82.474,26.303 ATMEGA4809.3
  Bottom Layer w0.254: K12.9 58.641,21.877 59.587,21.877 60.517,20.947 63.705,20.947 64.632,20.02 64.632,19.372 66.013,17.991 69.221,17.991 v1(77.533,26.303)
NetATMEGA4809_11: ATMEGA4809.11 k7.2 R16.2 | length 20.6
  Top Layer w0.254: R16.2 79.615,7.507 k7.2 79.615,17.787 ATMEGA4809.11
NetATMEGA4809_16: ATMEGA4809.16 K5.1 | length 16.7
  Top Layer w0.254: K5.1 88.505,12.841 88.505,20.962 90.664,23.121 90.664,24.915 ATMEGA4809.16
NetATMEGA4809_17: ATMEGA4809.17 K5.2 | length 16.3
  Top Layer w0.254: K5.2 89.013,20.828 91.118,22.933 91.118,25.17 ATMEGA4809.17
NetATMEGA4809_23: ATMEGA4809.23 K9.1 | length 19.3
  Top Layer w0.254: ATMEGA4809.23 93.973,26.557 104.761,26.557 K9.1
NetATMEGA4809_24: ATMEGA4809.24 K9.2 | length 18.7
  Top Layer w0.254: ATMEGA4809.24 104.042,28.379 K9.2
NetATMEGA4809_25: ATMEGA4809.25 K9.3 | length 18.9
  Top Layer w0.254: ATMEGA4809.25 103.447,30.324 K9.3
NetATMEGA4809_26: ATMEGA4809.26 K9.4 | length 20.2
  Top Layer w0.254: ATMEGA4809.26 100.577,38.749 K9.4
NetATMEGA4809_27: ATMEGA4809.27 K9.5 | length 21.4
  Top Layer w0.254: ATMEGA4809.27 102.41,41.289 K9.5
NetATMEGA4809_28: ATMEGA4809.28 C11.1 L1.1 | length 20
  Top Layer w0.254: ATMEGA4809.28@91.798,31.386 97.483,37.071 L1.1 94.894,46.242 C11.1
NetATMEGA4809_31: ATMEGA4809.31 K4.1 | length 13.9
  Top Layer w0.254: ATMEGA4809.31 92.026,33.734 92.026,44.245 K4.1
NetATMEGA4809_32: ATMEGA4809.32 K4.2 | length 14.2
  Top Layer w0.254: K4.2 88.378,41.545 91.424,38.499 91.424,33.838 ATMEGA4809.32@90.385,32.799
NetATMEGA4809_33: ATMEGA4809.33 K4.3 | length 14.6
  Top Layer w0.254: K4.3 85.838,41.07 90.839,36.068 90.839,33.896 90.096,33.152 ATMEGA4809.33
NetATMEGA4809_34: "K6 UART2.2" ATMEGA4809.34 | length 17.6
  Top Layer w0.254: 79.234,45.353 82.971,41.616 84.329,41.616 90.385,35.56 90.385,34.215 ATMEGA4809.34
NetATMEGA4809_35: "K6 UART2.3" ATMEGA4809.35 | length 19
  Top Layer w0.254: 76.694,45.353 80.885,41.162 83.905,41.162 89.931,35.136 89.931,34.468 ATMEGA4809.35
NetATMEGA4809_38: ATMEGA4809.38 k11.1 | length 20.5
  Top Layer w0.254: k11.1 77.71,40.4 77.773,40.337 ; 80.821,40.337 85.941,35.218 85.941,34.589 ATMEGA4809.38
  Bottom Layer w0.254: 77.773,40.337 80.821,40.337
NetATMEGA4809_39: ATMEGA4809.39 k11.4 | length 23.8
  Top Layer w0.254: k11.4 67.816,41.785 78.038,41.785 80.566,39.257 81.012,39.257 84.448,35.821 84.448,35.375 ATMEGA4809.39
NetATMEGA4809_40: ATMEGA4809.40 C14.1 D3.2 | length 36.9
  Top Layer w0.254: D3.2 60.327,45.127 61.542,46.343 C14.1 61.542,49.357 67.716,49.506 v1(71.741,45.48) ; v1(78.23,38.102) 81.525,38.102 83.994,35.633 83.994,35.122 ATMEGA4809.40
  Bottom Layer w0.254: v1(71.741,45.48) 78.23,38.991 v1(78.23,38.102)
NetATMEGA4809_41: ATMEGA4809.41 C14.2 k11.3 k11.5 | length 30.5
  Top Layer w0.254: C14.2 66.915,47.766 k11.5 k11.3 ; v1(80.925,37.139) 81.27,37.139 ATMEGA4809.41
  Bottom Layer w0.254: k11.3 75.37,36.771 80.558,36.771 v1(80.925,37.139)
NetATMEGA4809_44: ATMEGA4809.44 k10.1 | length 25
  Top Layer w0.254: k10.1 62.597,37.186 79.102,37.186 ATMEGA4809.44
NetATMEGA4809_45: ATMEGA4809.45 k10.2 | length 23.6
  Top Layer w0.254: k10.2 77.583,35.447 77.952,35.816 78.737,35.816 81.199,33.354 82.226,33.354 ATMEGA4809.45
NetATMEGA4809_46: ATMEGA4809.46 K12.4 R22.1 | length 37.1
  Top Layer w0.254: R22.1 66.026,13.73 K12.4 ; 78.599,35.066 81.019,32.646 82.228,32.646 ATMEGA4809.46
  Bottom Layer w0.254: K12.4 64.899,20.699 64.899,24.16 76.494,35.755 77.91,35.755 78.599,35.066
NetATMEGA4809_47: ATMEGA4809.47 K12.2 R21.1 | length 33.5
  Top Layer w0.254: K12.2 68.566,13.73 R21.1 ; v1(78.599,33.352) 79.315,33.352 80.569,32.097 82.069,32.097 ATMEGA4809.47
  Bottom Layer w0.254: K12.2 67.4,20.738 67.4,25.907 74.845,33.352 v1(78.599,33.352)
NetATMEGA4809_48: ATMEGA4809.48 K12.3 | length 28.2
  Top Layer w0.254: v1(74.606,30.324) ATMEGA4809.48
  Bottom Layer w0.254: K12.3 66.946,21.192 66.946,20.245 67.191,20.001 67.191,19.353 68.099,18.445 69.033,18.445 69.693,19.106 69.693,25.41 v1(74.606,30.324)
NetB1_3: B1.3 B2.3 B2.4 K1.1 K1.2 | length 28.5
  Top Layer w0.254: K1.2 132.461,42.164 B1.3 134.417,42.037 136.957,39.497 142.748,39.497 143.891,40.64 ; B2.4 143.891,40.64 ; B2.3 143.891,40.64
  Bottom Layer w0.508: K1.1 K1.2
NetB1_4: B1.4 D1.2 K2.2 T1.3 | length 38.8
  Top Layer w0.254: D1.2 107.188,19.32 107.493,19.625 v1(107.493,21.209) 108.763,19.939 T1.3
  Top Layer w0.508: K2.2 127,36.957 B1.4
  Bottom Layer w0.254: 114.605,28.321 K2.2
  Bottom Layer w0.508: v1(107.493,21.209) 114.605,28.321
NetC6_2: C6.2 C7.2 R8.1 | length 19.2
  Top Layer w0.254: C6.2 v1(14.263,59.399) ; v1(17.45,58.522) 19.304,58.522 R8.1
  Top Layer w0.381: R8.1 22.622,57.903 25.806,61.087 C7.2
  Bottom Layer w0.254: v1(14.263,59.399) 14.808,59.944 16.027,59.944 v1(17.45,58.522)
NetC7_1: C7.1 IC2B.5 R4.1 | length 27.1
  Top Layer w0.254: IC2B.5 20.965,67.325 22.25,66.04 ; C7.1 30.988,62.509 30.81,62.687 23.952,62.687 22.25,64.389 22.25,66.04 ; R4.1 27.584,67.183 26.721,68.047 22.606,68.047 22.25,67.691 22.25,66.04
NetC12_2: C12.2 C13.2 R15.1 | length 77.6
  Top Layer w0.254: C13.2 40.093,47.371 40.347,47.117 42.568,47.117 47.521,52.07 47.521,53.825 47.244,54.102 43.875,54.102 40.494,57.482 40.494,64.897 41.101,65.504 45.289,65.504 49.264,61.529 49.264,44.641 47.549,42.926 R15.1
  Top Layer w0.381: C12.2 40.386,39.624 41.783,41.021 R15.1
NetC13_1: C13.1 IC1A.3 R13.1 | length 14.4
  Top Layer w0.254: IC1A.3 36.164,45.537 36.728,46.101 36.728,48.133 39.697,51.102 39.742,51.102 ; R13.1 39.742,51.102 ; C13.1 41.695,49.149 39.742,51.102
NetC15_2: C15.2 K1d.5 R23.1 | length 51.9
  Top Layer w0.254: R23.1 55.363,65.185 C15.2 54.61,64.897 54.28,64.567 54.28,54.991 54.331,54.94 58.547,54.94 76.2,72.593 K1d.5
NetC16_2: C16.2 K1d.7 R24.1 | length 40.6
  Top Layer w0.254: C16.2 55.333,56.083 55.892,55.524 58.293,55.524 66.523,63.754 v1(66.523,67.666)
  Top Layer w0.381: R24.1 55.236,56.739 C16.2
  Bottom Layer w0.254: v1(66.523,67.666) K1d.7
NetC17_2: C17.2 ENC1.1 K1d.3 R25.1 | length 54.8
  Top Layer w0.254: R25.1 v1(55.372,79.807)
  Top Layer w0.381: R25.1 55.372,74.129 C17.2
  Bottom Layer w0.254: v1(55.372,79.807) 56.49,78.689 72.466,78.689 ; K1d.3 72.466,78.689 ; ENC1.1 65.024,67.437 65.024,71.247 72.466,78.689
NetIC1A_1: IC1A.1 R11.1 R14.2 | length 24.2
  Top Layer w0.254: R14.2 v1(25.146,40.903) ; v1(25.146,47.576) R11.1 ; 34.646,43.409 34.671,43.434 34.671,44.237 IC1A.1
  Bottom Layer w0.254: v1(25.146,40.903) v1(25.146,47.576) 29.314,43.409 34.646,43.409
NetIC1A_2: IC1A.2 R12.2 R15.2 | length 15.7
  Top Layer w0.254: R12.2 32.521,46.148 33.782,44.887 IC1A.2 38.608,44.887 39.733,43.762 R15.2
NetIC1d_2: IC1d.2 LD1.11 | length 42
  Top Layer w0.254: IC1d.2 84.328,105.156 84.836,105.664 94.615,105.664 LD1.11
NetIC1d_3: IC1d.3 LD1.4 | length 67.9
  Top Layer w0.254: IC1d.3 83.058,99.822 83.693,99.187 v1(83.693,88.9)
  Bottom Layer w0.254: v1(83.693,88.9) 84.57,88.023 130.036,88.023 LD1.4
NetIC1d_4: IC1d.4 LD1.2 | length 74.6
  Top Layer w0.254: IC1d.4 81.788,105.207 82.042,105.461 83.388,105.461 83.693,105.156 83.693,101.422 86.665,98.45 v1(86.665,89.56)
  Bottom Layer w0.254: v1(86.665,89.56) 86.97,89.256 133.883,89.256 LD1.2
NetIC1d_5: IC1d.5 LD1.5 | length 67.6
  Top Layer w0.254: IC1d.5 80.518,103.683 81.153,103.048 81.153,91.364 v1(80.899,91.11)
  Bottom Layer w0.254: v1(80.899,91.11) 80.899,89.916 83.972,86.843 128.676,86.843 LD1.5
NetIC1d_6: IC1d.6 LD1.7 | length 57.7
  Top Layer w0.254: IC1d.6 79.248,105.207 80.264,106.223 104.216,106.223 LD1.7
NetIC1d_7: IC1d.7 LD1.8 | length 68.3
  Top Layer w0.254: IC1d.7 77.978,101.016 v1(78.232,100.762)
  Bottom Layer w0.254: v1(78.232,100.762) 78.232,93.904 76.835,92.507 76.835,85.393 77.468,84.76 108.026,84.76 110.206,82.58 122.331,82.58 LD1.8
NetIC1d_8: IC1d.8 LD1.9 | length 65.6
  Top Layer w0.254: IC1d.8 76.708,103.175 76.073,102.54 76.073,96.012 74.498,94.437 74.498,90.424 76.022,88.9 v1(79.248,88.9)
  Bottom Layer w0.254: v1(79.248,88.9) 82.48,85.668 116.415,85.668 117.246,84.836 117.246,83.795 118.007,83.034 120.245,83.034 LD1.9
NetIC1d_9: IC1d.9 LD1.6 | length 64.9
  Top Layer w0.254: IC1d.9 75.438,105.664 76.632,106.858 106.121,106.858 LD1.6
NetIC1d_12: IC1d.12 LD1.12 | length 49.6
  Top Layer w0.254: IC1d.12 75.438,96.444 74.041,95.047 74.041,90.068 v1(77.724,86.385)
  Bottom Layer w0.254: v1(77.724,86.385) 78.896,85.214 112.525,85.214 LD1.12
NetIC1d_13: IC1d.13 LD1.10 | length 52.5
  Top Layer w0.254: IC1d.13 76.708,95.199 74.955,93.446 74.955,92.482 75.362,92.075 v1(77.724,92.075)
  Bottom Layer w0.254: v1(77.724,92.075) 83.515,86.284 116.535,86.284 LD1.10
NetIC1d_14: IC1d.14 LD1.3 | length 87.7
  Top Layer w0.254: v1(77.343,99.72) 77.978,99.085 IC1d.14
  Bottom Layer w0.254: v1(77.343,99.72) 77.343,101.346 77.648,101.651 98.196,101.651 104.978,94.869 136.22,94.869 142.646,88.443 142.646,82.906 137.693,82.906 LD1.3
NetIC1d_15: IC1d.15 LD1.1 | length 68.8
  Top Layer w0.254: v1(79.248,94.996) IC1d.15
  Bottom Layer w0.254: v1(79.248,94.996) 83.744,90.5 135.179,90.5 LD1.1
NetIC1d_17: IC1d.17 IC1d.18 K1d.2 K1d.4 | length 22.7
  Top Layer w0.254: K1d.4 76.556,85.319 78.243,85.319 81.788,88.864 81.788,96.952 IC1d.17
  Top Layer w0.381: K1d.2 K1d.4 ; IC1d.17@81.788,96.952 83.058,96.952 IC1d.18
NetIC2B_6: IC2B.6 R1.2 R8.2 | length 16.5
  Top Layer w0.254: v1(18.034,63.068) 19.304,61.798 R8.2 ; v1(18.034,68.301) 18.034,66.929 18.288,66.675 IC2B.6 ; v1(19.295,70.755) R1.2
  Bottom Layer w0.254: v1(18.034,63.068) v1(18.034,68.301) 18.034,69.494 v1(19.295,70.755)
NetIC2B_7: IC2B.7 R1.1 R5.2 | length 28.4
  Top Layer w0.254: v1(12.852,71.984) 14.072,70.764 14.072,63.271 14.36,63.271 R5.2 ; v1(15.596,69.24) 15.596,68.212 17.783,66.025 IC2B.7 ; v1(20.726,74.371) 21.345,73.753 R1.1
  Bottom Layer w0.254: v1(12.852,71.984) v1(15.596,69.24)
  Bottom Layer w0.381: v1(15.596,69.24) v1(20.726,74.371)
NetK2_1: K2.1
NetK3_1: K3.1 R2.1 R4.2 R9.2 R13.2 | length 74
  Top Layer w0.254: R4.2 v1(33.156,68.707) ; R13.2 41.792,52.163 v1(43.078,50.876) ; v1(44.298,55.829) 44.991,55.136 R2.1 46.355,57.836 41.075,63.115 41.075,64.389 41.609,64.923 44.907,64.923 48.683,61.147 48.683,46.388 47.498,45.203 R9.2
  Bottom Layer w0.254: v1(33.156,68.707) K3.1 43.51,67.488 43.51,55.042 ; v1(43.078,50.876) 43.51,51.308 43.51,55.042 ; v1(44.298,55.829) 43.51,55.042
NetK8_1: K8.1 L2.3 | length 10.2
  Top Layer w0.508: L2.3 41.355,15.24 K8.1
NetK8_2: K8.2 L2.4 | length 9.2
  Top Layer w0.508: L2.4 43.815,17.78 K8.2
NetL2_1: L2.1 T3.3 | length 8.4
  Top Layer w0.508: L2.1 24.943,17.78 24.943,23.298 25.654,24.009 T3.3
NetR7_2: R7.2 R10.2 T1.2 | length 22.2
  Top Layer w0.254: R10.2 106.105,4.962 106.096,4.953 R7.2 104.521,7.823 103.962,8.382 103.962,12.849 104.648,13.535 108.925,13.535 109.49,14.1 T1.2
NetR11_2: R11.2 R12.1 | length 5.5
  Top Layer w0.381: R11.2 30.471,52.705 R12.1
NetR17_1: R17.1 T2.2 T4.1 T5.2 | length 15.8
  Top Layer w0.254: R17.1 14.868,25.518 ; T2.2 15.494,25.654 14.868,25.518 ; T5.2 17.628,16.145 14.589,19.184 T4.1 14.589,20.193 15.494,21.098 15.494,24.892 14.868,25.518
NetR18_1: R18.1 T2.3 T5.3 | length 13.6
  Top Layer w0.254: T5.3 17.592,18.145 17.592,18.984 17.018,19.558 17.018,20.066 ; R18.1 17.018,20.066 ; T2.3 19.78,24.257 20.142,23.895 20.142,20.066 19.888,19.812 17.272,19.812 17.018,20.066
NetR18_2: R18.2 T3.1 | length 34.1
  Top Layer w0.254: R18.2 19.068,22.004 18.847,22.225 18.847,28.194 18.136,28.905 15.291,28.905 14.179,30.017 14.179,33.229 14.732,33.782 26.467,33.782 27.483,32.766 27.483,28.569 T3.1
NetR19_2: R19.2 R28.2 T4.2 | length 28.3
  Top Layer w0.381: v1(14.148,23.647) 14.148,21.778 T4.2 ; v1(21.133,19.863) 21.133,27.915 19.186,29.861 R19.2 R28.2
  Bottom Layer w0.381: v1(14.148,23.647) 14.148,21.209 15.494,19.863 v1(21.133,19.863)
PC0: ATMEGA4809.10 R19.1 | length 89.6
  Top Layer w0.254: v1(15.494,31.928) 17.136,31.928 R19.1 ; v1(79.477,23.952) 85.073,23.952 ATMEGA4809.10
  Bottom Layer w0.254: v1(15.494,31.928) 15.494,33.198 21.158,38.862 36.576,38.862 36.83,39.116 71.018,39.116 73.817,36.317 78.338,36.317 79.477,35.179 v1(79.477,23.952)
PD0: ATMEGA4809.20 C6.1 R5.1 | length 165.2
  Top Layer w0.254: C6.1 12.661,57.963 8.204,57.963 7.137,56.896 7.137,9.144 9.093,7.188 40.564,7.188 41.758,5.994 89.23,5.994 92.507,9.271 92.507,25.902 ATMEGA4809.20
  Top Layer w0.381: R5.1 12.31,60.833 12.661,60.482 C6.1
PD1: ATMEGA4809.21 C12.1 R14.1 | length 86
  Top Layer w0.254: C12.1 29.044,38.862 29.349,38.557 53.777,38.557 58.801,43.581 62.484,43.581 62.84,43.226 62.84,41.834 61.468,40.462 61.468,34.569 61.722,34.315 65.024,34.315 69.977,29.362 89.753,29.362 ATMEGA4809.21
  Top Layer w0.381: R14.1 25.442,38.853 26.213,39.624 C12.1
PD2: ATMEGA4809.22 D2.1 R3.1 R6.2 | length 23.4
  Top Layer w0.254: ATMEGA4809.22 92.216,27.672 102.108,17.78 R3.1 103.251,14.614 103.734,15.097 D2.1 106.045,15.097 106.655,14.487 R6.2
PE0: ATMEGA4809.30 R7.1 | length 98.4
  Top Layer w0.254: ATMEGA4809.30 91.091,32.157 93.624,34.69 93.624,47.244 99.568,53.188 112.878,53.188 112.878,2.616 111.76,1.499 105.054,1.499 104.521,2.032 R7.1
Vin: B1.1 C1.2 R3.2 R17.2 T2.1 T3.2 | length 195.4
  Top Layer w0.254: T3.2 v1(40.97,26.289) ; v1(102.108,8.382) R3.2
  Top Layer w0.508: R17.2 13.589,29.785 ; T2.1 15.82,27.554 13.589,29.785 ; 31.006,34.315 30.65,34.671 14.799,34.671 13.589,33.461 13.589,29.785
  Top Layer w1.27: C1.2 141.351,22.098 B1.1
  Bottom Layer w1.27: 31.006,34.315 35.916,34.315 40.97,29.261 v1(40.97,26.289) 40.97,24.511 57.099,8.382 v1(102.108,8.382) 142.131,8.382 142.875,9.126 142.875,17.526 C1.2